# Altium PCB Trackpad.PcbDoc (part 2 of 3)
Units mm, origin at the board's own origin, x right, y up, seen from the top; angles counter-clockwise.
Board outline 170 x 125 mm, 6 copper layers (Top Layer, Inner 1, Inner 2, Inner 3, Inner 4, Bottom Layer), stack 1.58 mm thick; 124 components, 120 nets, 488 pads, 1566 vias.
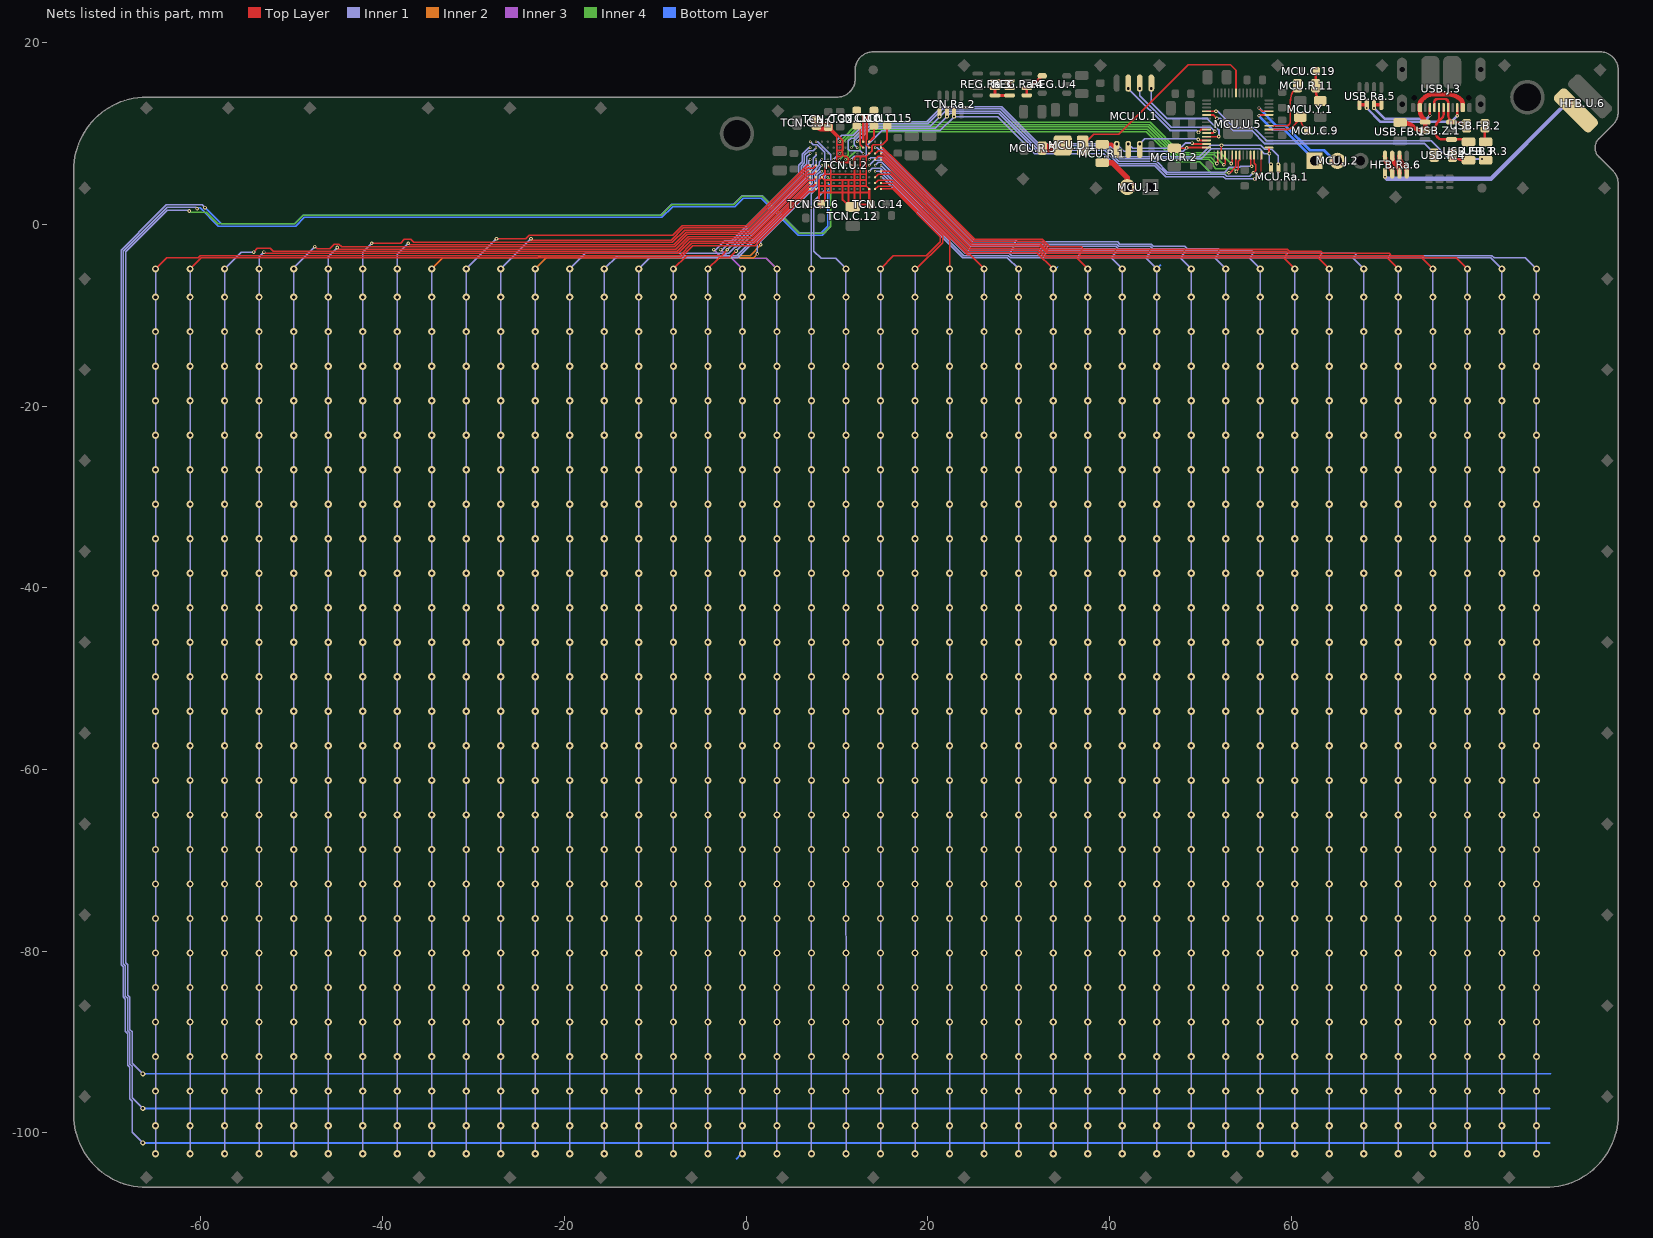
[diagram p6: the nets of this part, all layers, seen from the top]

## Via types
v1: diameter 0.8, hole 0.4, Top Layer to Bottom Layer, tented both sides, 1109 vias
v2: diameter 0.4, hole 0.2, Top Layer to Bottom Layer, tented both sides, 131 vias
v3: diameter 0.55, hole 0.3, Top Layer to Bottom Layer, tented both sides, 97 vias
v4: diameter 0.25, hole 0.15, Top Layer to Bottom Layer, tented both sides, 74 vias
v5: diameter 1.016, hole 0.508, Top Layer to Bottom Layer, tented both sides, 60 vias
v6: diameter 0.45, hole 0.3, Top Layer to Bottom Layer, tented both sides, 37 vias
v7: diameter 0.35, hole 0.2, Top Layer to Bottom Layer, tented both sides, 31 vias
v8: diameter 0.7, hole 0.4, Top Layer to Bottom Layer, tented both sides, 22 vias
v9: diameter 0.6, hole 0.3, Top Layer to Bottom Layer, tented both sides, 3 vias
v10: diameter 0.7, hole 0.3, Top Layer to Bottom Layer, tented both sides, 2 vias

## Nets (pads, with @x,y where several pads share a name; then routed paths per layer and width w, separated by ;. In a path a pad name is that pad's centre, name@x,y a point inside that pad or via, vN(x,y) a via of type N, cw(c..) or ccw(c..) an arc to the next point about the centre after c; other vN are vias at no path point) (continued)
NetHFB.Ra.6_2: HFB.Ra.6.2 HFB.Ra.6.8 | length 2.1
  Top Layer w0.5: HFB.Ra.6.2@71.925,7.525 ccw(c73.192,7.525) 72.296,6.629 72.375,6.55 cw(c71.53,5.705) 72.725,5.705 HFB.Ra.6.8@72.725,5.625
NetHFB.Ra.6_3: HFB.Ra.6.3 HFB.Ra.6.7 | length 2.1
  Top Layer w0.5: HFB.Ra.6.3@71.125,7.525 ccw(c72.513,7.525) 71.532,6.543 71.575,6.5 cw(c70.73,5.655) 71.925,5.655 HFB.Ra.6.7@71.925,5.625
NetHFB.Ra.6_4: HFB.Ra.6.4 HFB.Ra.6.6 | length 2.1
  Top Layer w0.5: HFB.Ra.6.4@70.325,7.525 ccw(c71.834,7.525) 70.767,6.458 70.789,6.436 cw(c69.978,5.625) HFB.Ra.6.6@71.125,5.625
NetHFB.Ra.6_5: HFB.Ra.6.5 HFB.U.6.1 | length 23.8
  Top Layer w0.45: v2(70.325,5.25) HFB.Ra.6.5@70.325,5.625
  Inner 1 w0.45: v2(70.325,5.25) 70.55,5.025 81.975,5.025 90,13.05 v2(90.3,13.05)
NetMCU.C.9_1: MCU.C.9.1 MCU.U.5.20 MCU.Y.1.1 | length 5.8
  Top Layer w0.2: MCU.U.5.20@57.55,10.45 59.53,10.45 ccw(c59.53,11.162) 60.034,10.659 60.876,11.501 ccw(c60.578,11.8) MCU.Y.1.1@61,11.798 ; MCU.C.9.1@61.8,10.3 61.495,10.605 cw(c62.69,11.8) MCU.Y.1.1@61,11.798 ; MCU.Y.1.1@61,11.798 cw(c62.69,11.8) MCU.Y.1.1@61,11.8 cw(c60.578,11.8) MCU.Y.1.1@61,11.798
NetMCU.C.19_2: MCU.C.19.2 MCU.R.11.2 MCU.Y.1.3 | length 3.4
  Top Layer w0.27: MCU.C.19.2@62.775,16.85 ccw(c62.95,16.675) 62.702,16.675 MCU.R.11.2@62.702,15.275 62.702,14.801 ccw(c64.401,14.801) MCU.Y.1.3@63.2,13.6
NetMCU.D.1_1: MCU.D.1.1 MCU.U.5.36 | length 23.3
  Top Layer w0.2: MCU.D.1.1@37.05,8.7 38.275,9.925 41,9.925 48.65,17.575 53.325,17.575 53.925,16.975 MCU.U.5.36@53.925,14.475
NetMCU.D.1_2: MCU.D.1.2 MCU.R.5.2 | length 2.3
  Top Layer w1: MCU.R.5.2@32.625,8.4 34.126,8.4 ccw(c34.126,9.424) MCU.D.1.2@34.85,8.7
NetMCU.J.1_2: MCU.J.1.2 MCU.R.1.1 | length 4.5
  Top Layer w0.6: MCU.R.1.1@39.2,6.798 40.277,6.798 41.96,5.115 MCU.J.1.2@41.96,4.1
NetMCU.J.2_1: MCU.J.2.1 MCU.U.5.24 | length 9.3
  Top Layer w0.2: v7(56.45,11.95) cw(c56.691,11.709) 56.691,12.05 MCU.U.5.24@57.55,12.05
  Bottom Layer w0.3: v7(56.45,11.95) 57.95,10.45 59.2,10.45 62.56,7.09 MCU.J.2.1@62.56,7
NetMCU.J.2_2: MCU.J.2.2 MCU.U.5.25 | length 12.3
  Top Layer w0.2: v7(56.45,12.8) 56.8,12.45 MCU.U.5.25@57.55,12.45
  Bottom Layer w0.3: v7(56.45,12.8) 58.4,10.85 59.4,10.85 62.088,8.163 63.638,8.163 64.8,7 MCU.J.2.2@65.1,7
NetMCU.R.1_2: MCU.R.1.2 MCU.R.2.2 MCU.U.1.1 MCU.U.5.56 | length 13.6
  Top Layer w0.2: MCU.R.2.2@47.15,8.377 48.452,8.377 v2(48.5,8.425) 48.525,8.45 MCU.U.5.56@50.7,8.45
  Top Layer w0.4: MCU.R.1.2@39.2,8.802 40.243,8.802 MCU.U.1.1@40.795,8.25
  Inner 1 w0.2: v3(40.8,8.85) 41.6,8.05 48.125,8.05 v2(48.5,8.425)
NetMCU.R.11_1: MCU.R.11.1 MCU.U.5.21 | length 6.8
  Top Layer w0.2: MCU.U.5.21@57.55,10.85 59.45,10.85 ccw(c59.45,11.3) 59.9,11.3 59.9,13.425 cw(c62.44,13.425) 60.644,15.221 MCU.R.11.1@60.698,15.275
NetMCU.Ra.1_3: MCU.Ra.1.3 MCU.U.5.3 TCN.U.2.F9 | length 57.7
  Top Layer w0.15: MCU.U.5.3@52.325,7.625 v2(52.325,8.7)
  Inner 1 w0.15: v4(9.65,7.15) 9.975,7.475 9.975,9.25 10.525,9.8 11.8,9.8 13.325,11.325 19.875,11.325 21.525,12.975 28.136,12.975 32.211,8.9 39.806,8.9 41.256,7.45 49.875,7.45 51.125,8.7 v2(52.325,8.7) 56.675,8.7 57.1,8.275 57.875,8.275 58.585,7.565 v7(58.585,6.594)
NetMCU.Ra.1_4: MCU.Ra.1.4 MCU.U.5.15 TCN.U.2.G4 | length 55.5
  Top Layer w0.2: MCU.U.5.15@57.55,8.45 57.55,7.85 v2(57.6,7.8)
  Inner 1 w0.15: v4(12.9,7.8) 12.575,8.125 11.4,8.125 11.275,8.25 11.275,9.2 11.575,9.5 11.854,9.5 13.429,11.075 20,11.075 21.65,12.725 28.032,12.725 32.107,8.65 39.702,8.65 41.152,7.2 50.1,7.2 51.2,8.3 56.55,8.3 57.05,7.8 v2(57.6,7.8) 57.6,6.779 v7(57.785,6.594)
NetMCU.U.1_2: MCU.U.1.2 MCU.U.5.55 | length 9.1
  Top Layer w0.2: v2(49.1,8.95) 49.2,8.85 MCU.U.5.55@50.7,8.85
  Inner 1 w0.2: v3(42.075,8.85) 42.55,8.375 47.775,8.375 48.35,8.95 v2(49.1,8.95)
NetMCU.U.1_3: MCU.U.1.3 MCU.U.5.54 | length 7.7
  Top Layer w0.2: v2(49.775,9.35) 49.875,9.25 MCU.U.5.54@50.7,9.25
  Inner 1 w0.2: v3(43.325,8.85) 43.9,9.425 49.7,9.425 v2(49.775,9.35)
NetMCU.U.1_5: MCU.U.1.5 MCU.U.5.53 | length 12.3
  Top Layer w0.2: MCU.U.5.53@50.7,9.65 52,9.65 v2(52.025,9.675)
  Inner 1 w0.2: v3(44.6,14.95) 44.6,13.4 46.35,11.65 50.775,11.65 52.05,10.375 52.05,9.7 v2(52.025,9.675)
NetMCU.U.1_6: MCU.U.1.6 MCU.U.5.52 | length 11.7
  Top Layer w0.2: MCU.U.5.52@50.7,10.05 51.4,10.05 v2(51.6,10.25)
  Inner 1 w0.2: v3(43.325,14.95) 43.325,14.175 46.8,10.7 51.15,10.7 v2(51.6,10.25)
NetMCU.U.1_7: MCU.U.1.7 MCU.U.5.51 | length 10.8
  Top Layer w0.2: v2(49.8,10.125) 50.125,10.45 MCU.U.5.51@50.7,10.45
  Inner 1 w0.2: v3(42.075,14.95) 46.675,10.35 49.575,10.35 v2(49.8,10.125)
NetMCU.U.5_2: MCU.U.5.2 TCN.U.2.F8 | length 46.6
  Top Layer w0.15: v2(51.825,6.7) 51.925,6.8 MCU.U.5.2@51.925,7.625
  Inner 4 w0.15: v4(10.3,7.15) 10.625,7.475 11.1,7.475 11.275,7.65 11.275,9.325 12.675,10.725 44.279,10.725 47.604,7.4 51.125,7.4 v2(51.825,6.7)
NetMCU.U.5_4: MCU.U.5.4 TCN.U.2.G8 | length 47.1
  Top Layer w0.15: v2(52.6,6.575) 52.725,6.7 MCU.U.5.4@52.725,7.625
  Inner 4 w0.15: v4(10.3,7.8) 10.625,8.125 10.625,9.05 12.55,10.975 44.382,10.975 47.707,7.65 51.525,7.65 v2(52.6,6.575)
NetMCU.U.5_6: MCU.U.5.6 TCN.U.2.J8 | length 46.8
  Top Layer w0.15: v2(53.4,6.7) 53.525,6.825 MCU.U.5.6@53.525,7.625
  Inner 4 w0.15: v4(10.3,9.1) 12.425,11.225 44.486,11.225 47.805,7.905 52.195,7.905 v2(53.4,6.7)
NetMCU.U.5_7: MCU.U.5.7 TCN.U.2.F7 | length 48.7
  Top Layer w0.15: v2(53.15,5.675) 53.275,5.675 53.925,6.325 MCU.U.5.7@53.925,7.625
  Inner 4 w0.15: v4(10.95,7.15) 11.15,7.15 12.125,8.125 12.425,8.125 12.575,8.275 12.575,9.875 12.925,10.225 44.071,10.225 47.396,6.9 49.95,6.9 51.15,5.7 53.175,5.7 v2(53.15,5.675)
NetMCU.U.5_8: MCU.U.5.8 TCN.U.2.H6 | length 47.7
  Top Layer w0.15: v2(53.975,5.825) 54.2,6.05 54.2,6.95 54.32,7.07 54.32,7.62 MCU.U.5.8@54.325,7.625
  Inner 4 w0.15: v4(11.6,8.45) 11.925,8.775 11.925,9.6 12.8,10.475 44.175,10.475 47.5,7.15 50.925,7.15 51.4,6.675 51.4,6.475 51.725,6.15 53.65,6.15 v2(53.975,5.825)
NetMCU.U.5_11: MCU.U.5.11 TCN.Ra.2.1 TCN.U.2.H5 | length 50.3
  Top Layer w0.15: MCU.U.5.11@55.525,7.625 55.525,6.525 v2(55.65,6.4)
  Inner 1 w0.15: v4(12.25,8.45) 11.925,8.775 11.925,9.2 13.55,10.825 20.25,10.825 v7(21.3,11.875) 21.9,12.475 27.929,12.475 32.004,8.4 39.599,8.4 41.049,6.95 45.182,6.95 46.382,5.75 52.675,5.75 53.2,6.275 54.35,6.275 54.475,6.4 v2(55.65,6.4)
NetMCU.U.5_12: MCU.U.5.12 TCN.Ra.2.2 TCN.U.2.J5 | length 50
  Top Layer w0.15: v2(55.825,5.675) 56.075,5.925 56.075,6.575 55.925,6.725 MCU.U.5.12@55.925,7.625
  Inner 1 w0.15: v4(12.25,9.1) 13.725,10.575 20.8,10.575 v7(22.1,11.875) 22.45,12.225 27.825,12.225 31.9,8.15 39.495,8.15 40.945,6.7 45.079,6.7 46.279,5.5 52.675,5.5 52.9,5.275 55.425,5.275 v2(55.825,5.675)
NetMCU.U.5_14: MCU.U.5.14 TCN.Ra.2.3 TCN.U.2.F6 | length 52.7
  Top Layer w0.12: v2(56,5) 56.725,5.725 MCU.U.5.14@56.725,7.625
  Inner 1 w0.15: v4(11.6,7.15) 11.925,7.475 13.075,7.475 13.225,7.625 13.225,8.575 14.95,10.3 21.325,10.3 v7(22.9,11.875) 27.68,11.875 31.755,7.8 39.35,7.8 40.7,6.45 44.975,6.45 46.175,5.25 52.55,5.25 52.8,5 v2(56,5)
NetMCU.U.5_46: MCU.U.5.46 USB.R.3.2 | length 32.9
  Top Layer w0.2: MCU.U.5.46@50.7,12.45 v2(51.725,12.45) ; v2(81,7.2) ccw(c81.308,7.508) 81.308,7.073 USB.R.3.2@81.4,7.073
  Inner 1 w0.2: v2(51.725,12.45) 51.925,12.45 53.75,10.625 55.875,10.625 57.3,9.2 75.4,9.2 77.4,7.2 v2(81,7.2)
NetMCU.U.5_47: MCU.U.5.47 USB.R.4.2 | length 27
  Top Layer w0.2: MCU.U.5.47@50.7,12.05 51.425,12.05 v2(51.825,11.65) ; v2(75.6,8) 75.6,7.956 ccw(c76.104,7.956) USB.R.4.2@75.748,7.6
  Inner 1 w0.2: v2(51.825,11.65) 52.25,11.65 53.6,10.3 55.7,10.3 57.1,8.9 74.7,8.9 v2(75.6,8)
NetREG.Ra.3_5: REG.Ra.3.5 REG.Ra.3.6 REG.Ra.4.4 | length 2.4
  Top Layer w0.3: REG.Ra.3.6@27.4,15 REG.Ra.3.5@27.4,14.2 REG.Ra.4.4@29,14.2
NetREG.Ra.3_7: REG.Ra.3.7 REG.Ra.4.2 REG.Ra.4.3 | length 2.4
  Top Layer w0.3: REG.Ra.3.7@27.4,15.8 REG.Ra.4.2@29,15.8 REG.Ra.4.3@29,15
NetREG.Ra.4_5: REG.Ra.4.5 REG.Ra.4.6 REG.U.4.4 | length 3.1
  Top Layer w0.3: REG.Ra.4.5@30.9,14.2 REG.Ra.4.6@30.9,15 31.2,15 32.55,16.35 REG.U.4.4@32.6,16.35
NetTCN.C.10_1: TCN.C.10.1 TCN.U.2.J4 | length 3.8
  Top Layer w0.25: TCN.C.10.1@12.175,12.55 12.9,11.825 12.9,10.125 TCN.U.2.J4@12.9,9.1
NetTCN.C.10_2: TCN.C.10.2 TCN.U.2.H4 | length 2.7
  Top Layer w0.2: TCN.C.10.2@12.175,10.85 12.575,10.45 12.575,8.775 TCN.U.2.H4@12.9,8.45
NetTCN.C.11_1: TCN.C.11.1 TCN.U.2.H3 | length 4.6
  Top Layer w0.2: 13.288,9.388 13.225,9.325 13.225,8.775 TCN.U.2.H3@13.55,8.45
  Top Layer w0.25: 13.288,9.388 13.288,11.763 TCN.C.11.1@14.075,12.55
NetTCN.C.11_2: TCN.C.11.2 TCN.U.2.J3 | length 2
  Top Layer w0.25: TCN.U.2.J3@13.55,9.1 14.075,9.625 TCN.C.11.2@14.075,10.85
NetTCN.C.12_2: TCN.C.12.2 TCN.C.14.2 TCN.C.15.2 TCN.C.16.2 TCN.U.2.A3 TCN.U.2.C11 TCN.U.2.E10 TCN.U.2.G3 | length 63
  Top Layer w0.2: 13.55,3.5 12.575,3.5 ; TCN.U.2.A3@13.55,3.9 13.225,4.225 ; TCN.C.15.2@15.525,10.85 15.5,10.825 15.5,9.275 15,8.775 14,8.775 13.875,8.65 13.875,8.125 TCN.U.2.G3@13.55,7.8 13.225,7.475 ; 8.025,3.5 8.675,3.5 ; 8.025,3.5 8.025,4.225 ; 8.025,3.5 8.025,2.45 TCN.C.16.2@8.275,2.2 8.675,2.6 8.675,3.5 ; 8.025,4.225 8.675,4.225 ; 8.025,4.225 8.025,4.875 TCN.U.2.C11@8.35,5.2 ; TCN.U.2.C11@8.35,5.2 8.675,4.875 ; TCN.U.2.C11@8.35,5.2 8.675,5.525 ; 8.675,3.5 9.325,3.5 ; 8.675,3.5 8.675,4.225 ; 8.675,4.225 9.325,4.225 ; 8.675,4.225 8.675,4.875 ; 8.675,4.875 9.325,4.875 ; 8.675,5.525 9.325,5.525 ; 8.675,5.525 8.675,6.175 TCN.U.2.E10@9,6.5 9.325,6.175 9.325,5.525 ; 9.325,3.5 10.625,3.5 ; 9.325,3.5 9.325,4.225 ; 9.325,4.225 10.625,4.225 ; 9.325,4.225 9.325,4.875 ; 9.325,4.875 9.325,5.525 ; 9.325,4.875 10.625,4.875 ; 9.325,5.525 11.925,5.525 ; 10.625,3.5 10.625,2.7 11.398,1.927 TCN.C.12.2@11.75,1.927 ; 10.625,3.5 11.275,3.5 ; 10.625,3.5 10.625,4.225 ; 10.625,4.225 11.275,4.225 ; 10.625,4.225 10.625,4.875 ; 10.625,4.875 11.275,4.875 ; 11.275,3.5 11.925,3.5 ; 11.275,3.5 11.275,4.225 ; 11.275,3.5 11.275,2.402 TCN.C.12.2@11.75,1.927 ; 11.275,4.225 11.925,4.225 ; 11.275,4.225 11.275,4.875 ; 11.275,4.875 11.925,4.875 ; TCN.C.12.2@11.75,1.927 12.002,1.927 12.275,2.2 12.575,2.5 12.575,3.5 ; TCN.C.12.2@11.75,1.927 11.925,2.102 11.925,3.5 ; 11.925,3.5 12.575,3.5 ; 11.925,3.5 11.925,4.225 ; 11.925,4.225 11.925,4.875 ; 11.925,4.225 12.575,4.225 ; 11.925,4.875 11.925,5.525 ; 11.925,4.875 12.575,4.875 ; 11.925,5.525 12.575,5.525 ; 11.925,5.525 11.925,7.3 12.1,7.475 12.75,7.475 ; 12.575,3.5 12.575,4.225 ; 12.575,4.225 13.225,4.225 ; 12.575,4.225 12.575,4.875 ; 12.575,4.875 12.575,5.525 ; 12.575,4.875 13.225,4.875 ; 12.575,5.525 12.575,7.3 12.75,7.475 ; 12.575,5.525 13.225,5.525 ; 12.75,7.475 13.225,7.475 ; 13.225,4.225 13.225,4.875 ; 13.225,4.875 13.225,5.525 ; 13.225,5.525 13.225,7.475
  Top Layer w0.25: TCN.C.12.2@11.925,2.102 12.023,2.2 12.275,2.2 TCN.C.14.2@13.725,2.2 13.55,2.375 13.55,3.5 TCN.U.2.A3@13.55,3.9
NetTCN.C.31_2: TCN.C.31.2 TCN.C.32.2 TCN.U.2.E6 | length 14.5
  Top Layer w0.2: TCN.U.2.E6@11.6,6.5 11.275,6.825 ; 9.975,7.475 9.975,8.15 ; 9.975,7.475 9.975,7 10.15,6.825 11.275,6.825 ; 9.975,7.475 10.45,7.475 10.625,7.65 ; 9.975,8.15 9.975,8.775 ; 9.975,8.15 10,8.125 10.625,8.125 ; 9.975,8.775 9.975,9.65 9.05,10.575 TCN.C.32.2@9.05,10.7 9.2,10.7 10.625,9.275 10.625,8.775 ; 9.975,8.775 10.625,8.775 ; 10.625,7.65 10.625,8.125 ; 10.625,7.65 10.8,7.475 11.075,7.475 11.275,7.275 11.275,6.825 ; 10.625,8.125 10.625,8.775
  Top Layer w1: TCN.C.31.2@7.727,11.2 8.227,10.7 TCN.C.32.2@9.05,10.7
NetUSB.FB.1_1: USB.FB.1.1 USB.J.3.2 USB.J.3.11 USB.Z.1.4 USB.Z.1.5 | length 12
  Top Layer w0.5: USB.FB.1.1@72.293,11.2 cw(c72.293,9.493) 73.5,10.7 ccw(c74.466,11.666) USB.Z.1.5@74.466,10.3 ; USB.Z.1.5@74.366,10.3 USB.Z.1.5@74.466,10.3 ; USB.J.3.2@78.875,12.85 78.875,13.278 ccw(c78.278,13.278) 78.7,13.7 ccw(c77.131,12.131) 77.131,14.35 75.675,14.35 ccw(c75.675,12.841) 74.608,13.908 74.325,13.625 ccw(c74.687,13.263) 74.175,13.263 USB.J.3.11@74.175,12.85 74.175,12.51 ccw(c75.285,12.51) 74.5,11.725 cw(c73.896,11.121) 74.75,11.121 USB.Z.1.5@74.75,10.3 USB.Z.1.5@74.466,10.3
NetUSB.FB.2_1: USB.FB.2.1 USB.J.3.5 USB.J.3.8 USB.Z.1.3 | length 6.6
  Top Layer w0.27: USB.J.3.8@75.775,12.85 75.775,13.5 cw(c76.075,13.5) 76.075,13.8 76.95,13.8 cw(c76.95,13.475) 77.275,13.475 USB.J.3.5@77.275,12.85 77.275,12.155 ccw(c78.555,12.155) USB.Z.1.3@77.65,11.25 78.357,11.25 cw(c78.357,9.884) USB.FB.2.1@79.323,10.85
NetUSB.FB.2_2: USB.FB.2.2 USB.R.3.1 | length 1.8
  Top Layer w0.27: USB.FB.2.2@81.327,10.85 81.327,9.253 ccw(c81.575,9.253) USB.R.3.1@81.4,9.077
NetUSB.FB.3_1: USB.FB.3.1 USB.J.3.6 USB.J.3.7 USB.Z.1.1 | length 8.9
  Top Layer w0.27: USB.J.3.7@76.275,12.85 76.275,11.587 cw(c75.763,11.587) 76.125,11.225 ; USB.J.3.6@76.775,12.85 76.775,12.1 cw(c76.232,12.1) 76.616,11.716 76.125,11.225 ; USB.FB.3.1@79.525,9.077 ccw(c78.867,8.419) 78.867,9.35 USB.Z.1.1@77.65,9.35 76.704,9.35 cw(c76.704,10.204) 76.1,9.6 cw(c76.704,10.204) 75.85,10.204 75.85,10.561 cw(c76.789,10.561) 76.125,11.225
NetUSB.FB.3_2: USB.FB.3.2 USB.R.4.1 | length 1.9
  Top Layer w0.27: USB.R.4.1@77.752,7.6 ccw(c79.026,8.873) 79.026,7.073 USB.FB.3.2@79.525,7.073
NetUSB.J.3_3: USB.J.3.3 USB.Ra.5.5 USB.Ra.5.6 | length 12.6
  Top Layer w0.27: v7(78.275,11.95) USB.J.3.3@78.275,12.85
  Top Layer w0.4: USB.Ra.5.5@67.525,13.175 USB.Ra.5.6@68.325,13.175
  Inner 1 w0.27: v7(68.325,12.8) 69.85,11.275 77.6,11.275 v7(78.275,11.95)
NetUSB.J.3_9: USB.J.3.9 USB.Ra.5.7 USB.Ra.5.8 | length 8.4
  Top Layer w0.27: v7(75.275,11.975) USB.J.3.9@75.275,12.85
  Top Layer w0.4: USB.Ra.5.7@69.125,13.175 USB.Ra.5.8@69.925,13.175
  Inner 1 w0.27: v7(69.125,12.8) 70.275,11.65 74.95,11.65 v7(75.275,11.975)
X0: TCN.U.2.A13 | length 173.2
  Top Layer w0.15: v1(-65,-4.9) -63.775,-3.675 -60.314,-3.675 -60.074,-3.435 -7.31,-3.435 -5.975,-2.1 0.904,-2.1 6.904,3.9 TCN.U.2.A13@7.05,3.9
  Inner 1 w0.15: v1@-65,-102.4 v1(-65,-102.3) v1(-65,-99.2) v1(-65,-95.4) v1(-65,-91.6) v1(-65,-87.8) v1(-65,-84) v1(-65,-80.2) v1(-65,-76.4) v1(-65,-72.6) v1(-65,-68.8) v1(-65,-65) v1(-65,-61.2) v1(-65,-57.4) v1(-65,-53.6) v1(-65,-49.8) v1(-65,-46) v1(-65,-42.2) v1(-65,-38.4) v1(-65,-34.6) v1(-65,-30.8) v1(-65,-27) v1(-65,-23.2) v1(-65,-19.4) v1(-65,-15.6) v1(-65,-11.8) v1(-65,-8) v1(-65,-4.9) ; v1(-65,-4.9) cw(c-53.653,-16.247) -64.995,-4.895 v1(-65,-4.9)
X1: TCN.U.2.A12 | length 170
  Top Layer w0.15: v1(-61.2,-4.9) -59.975,-3.675 -7.2,-3.675 -5.875,-2.35 0.993,-2.35 6.918,3.575 7.375,3.575 TCN.U.2.A12@7.7,3.9
  Inner 1 w0.15: v1@-61.2,-102.4 v1(-61.2,-102.3) v1(-61.2,-99.2) v1(-61.2,-95.4) v1(-61.2,-91.6) v1(-61.2,-87.8) v1(-61.2,-84) v1(-61.2,-80.2) v1(-61.2,-76.4) v1(-61.2,-30.8) v1(-61.2,-27) v1(-61.2,-4.9)
  other v1: -61.2,-72.6 -61.2,-68.8 -61.2,-65 -61.2,-61.2 -61.2,-57.4 -61.2,-53.6 -61.2,-49.8 -61.2,-46 -61.2,-42.2 -61.2,-38.4 -61.2,-34.6 -61.2,-23.2 -61.2,-19.4 -61.2,-15.6 -61.2,-11.8 -61.2,-8
X2: TCN.U.2.B13 | length 166.5
  Top Layer w0.15: v2(-54.2,-3.05) -53.8,-2.65 -52.35,-2.65 -52.05,-2.95 -7.6,-2.95 -6.25,-1.6 0.725,-1.6 6.875,4.55 TCN.U.2.B13@7.05,4.55
  Inner 1 w0.15: v1@-57.4,-102.4 v1(-57.4,-102.3) v1(-57.4,-99.2) v1(-57.4,-95.4) v1(-57.4,-91.6) v1(-57.4,-87.8) v1(-57.4,-84) v1(-57.4,-80.2) v1(-57.4,-76.4) v1(-57.4,-30.8) v1(-57.4,-27) v1(-57.4,-4.9) -55.55,-3.05 v2(-54.2,-3.05)
  Bottom Layer w0.15: v1(-57.4,-4.9) v1@-57.137,-4.637
  other v1: -57.4,-72.6 -57.4,-68.8 -57.4,-65 -57.4,-61.2 -57.4,-57.4 -57.4,-53.6 -57.4,-49.8 -57.4,-46 -57.4,-42.2 -57.4,-38.4 -57.4,-34.6 -57.4,-23.2 -57.4,-19.4 -57.4,-15.6 -57.4,-11.8 -57.4,-8
X3: TCN.U.2.B12 | length 163.8
  Top Layer w0.15: v2(-53.075,-3.05) -52.93,-3.195 -7.47,-3.195 -6.125,-1.85 0.814,-1.85 6.889,4.225 7.375,4.225 TCN.U.2.B12@7.7,4.55
  Inner 1 w0.15: v1@-53.6,-102.4 v1(-53.6,-102.3) v1(-53.6,-99.2) v1(-53.6,-95.4) v1(-53.6,-91.6) v1(-53.6,-87.8) v1(-53.6,-84) v1(-53.6,-80.2) v1(-53.6,-76.4) v1(-53.6,-72.6) v1(-53.6,-68.8) v1(-53.6,-65) v1(-53.6,-61.2) v1(-53.6,-57.4) v1(-53.6,-53.6) v1(-53.6,-49.8) v1(-53.6,-46) v1(-53.6,-42.2) v1(-53.6,-38.4) v1(-53.6,-34.6) v1(-53.6,-30.8) v1(-53.6,-27) v1(-53.6,-23.2) v1(-53.6,-19.4) v1(-53.6,-15.6) v1(-53.6,-11.8) v1(-53.6,-8) v1(-53.6,-4.9) -53.6,-3.575 v2(-53.075,-3.05)
  Bottom Layer w0.15: v1(-53.6,-4.9) v1@-53.479,-4.779
X4: TCN.U.2.C13 | length 159.1
  Top Layer w0.15: v2(-47.475,-2.45) -47.225,-2.7 -45.85,-2.7 -45.325,-2.175 -44.825,-2.175 -44.53,-2.47 -7.87,-2.47 -6.5,-1.1 0.546,-1.1 6.676,5.03 6.846,5.2 TCN.U.2.C13@7.05,5.2
  Inner 1 w0.15: v1@-49.8,-102.4 v1(-49.8,-102.3) v1(-49.8,-99.2) v1(-49.8,-95.4) v1(-49.8,-91.6) v1(-49.8,-87.8) v1(-49.8,-84) v1(-49.8,-80.2) v1(-49.8,-76.4) v1(-49.8,-30.8) v1(-49.8,-27) v1(-49.8,-4.9) -49.8,-4.775 v2(-47.475,-2.45)
  other v1: -49.8,-72.6 -49.8,-68.8 -49.8,-65 -49.8,-61.2 -49.8,-57.4 -49.8,-53.6 -49.8,-49.8 -49.8,-46 -49.8,-42.2 -49.8,-38.4 -49.8,-34.6 -49.8,-23.2 -49.8,-19.4 -49.8,-15.6 -49.8,-11.8 -49.8,-8
X5: TCN.U.2.C12 | length 156.3
  Top Layer w0.15: v2(-45,-2.55) -44.84,-2.71 -7.735,-2.71 -6.375,-1.35 0.636,-1.35 6.861,4.875 7.375,4.875 TCN.U.2.C12@7.7,5.2
  Inner 1 w0.15: v1@-46,-102.4 v1(-46,-102.3) v1(-46,-99.2) v1(-46,-95.4) v1(-46,-91.6) v1(-46,-87.8) v1(-46,-84) v1(-46,-80.2) v1(-46,-76.4) v1(-46,-30.8) v1(-46,-27) v1(-46,-4.9) -46,-3.55 v2(-45,-2.55)
  other v1: -46,-72.6 -46,-68.8 -46,-65 -46,-61.2 -46,-57.4 -46,-53.6 -46,-49.8 -46,-46 -46,-42.2 -46,-38.4 -46,-34.6 -46,-23.2 -46,-19.4 -46,-15.6 -46,-11.8 -46,-8
X6: TCN.U.2.D13 | length 152.5
  Top Layer w0.15: v2(-41.2,-2.075) -38.025,-2.075 -37.6,-1.65 -36.9,-1.65 -36.575,-1.975 -8.125,-1.975 -6.77,-0.62 0.305,-0.62 6.775,5.85 TCN.U.2.D13@7.05,5.85
  Inner 1 w0.15: v1@-42.2,-102.4 v1(-42.2,-102.3) v1(-42.2,-99.2) v1(-42.2,-95.4) v1(-42.2,-91.6) v1(-42.2,-87.8) v1(-42.2,-84) v1(-42.2,-80.2) v1(-42.2,-76.4) v1(-42.2,-72.6) v1(-42.2,-68.8) v1(-42.2,-65) v1(-42.2,-61.2) v1(-42.2,-57.4) v1(-42.2,-53.6) v1(-42.2,-49.8) v1(-42.2,-46) v1(-42.2,-42.2) v1(-42.2,-38.4) v1(-42.2,-34.6) v1(-42.2,-30.8) v1(-42.2,-27) v1(-42.2,-23.2) v1(-42.2,-19.4) v1(-42.2,-15.6) v1(-42.2,-11.8) v1(-42.2,-8) v1(-42.2,-4.9) -42.2,-3.075 v2(-41.2,-2.075)
X7: TCN.U.2.D12 | length 149.1
  Top Layer w0.15: v2(-37.175,-2.075) -37.025,-2.225 -7.975,-2.225 -6.61,-0.86 0.415,-0.86 6.8,5.525 7.375,5.525 TCN.U.2.D12@7.7,5.85
  Inner 1 w0.15: v1@-38.4,-102.4 v1(-38.4,-102.3) v1(-38.4,-99.2) v1(-38.4,-95.4) v1(-38.4,-91.6) v1(-38.4,-87.8) v1(-38.4,-84) v1(-38.4,-80.2) v1(-38.4,-76.4) v1(-38.4,-30.8) v1(-38.4,-27) v1(-38.4,-4.9) -38.4,-3.3 v2(-37.175,-2.075)
  other v1: -38.4,-72.6 -38.4,-68.8 -38.4,-65 -38.4,-61.2 -38.4,-57.4 -38.4,-53.6 -38.4,-49.8 -38.4,-46 -38.4,-42.2 -38.4,-38.4 -38.4,-34.6 -38.4,-23.2 -38.4,-19.4 -38.4,-15.6 -38.4,-11.8 -38.4,-8
X8: TCN.U.2.D11 | length 146.1
  Inner 2 w0.15: v1(-34.6,-4.9) -33.375,-3.675 -22.925,-3.675 -22.675,-3.425 0.45,-3.425 v2(1.625,-2.25)
  Inner 1 w0.15: v1@-34.6,-102.4 v1(-34.6,-102.3) v1(-34.6,-99.2) v1(-34.6,-95.4) v1(-34.6,-91.6) v1(-34.6,-87.8) v1(-34.6,-84) v1(-34.6,-80.2) v1(-34.6,-76.4) v1(-34.6,-30.8) v1(-34.6,-27) v1(-34.6,-4.9) v1@-34.38,-4.68 ; v2(1.625,-2.25) 1.625,-1.85 7.8,4.325 7.8,5.45 8.2,5.85 v4(8.35,5.85)
  other v1: -34.6,-72.6 -34.6,-68.8 -34.6,-65 -34.6,-61.2 -34.6,-57.4 -34.6,-53.6 -34.6,-49.8 -34.6,-46 -34.6,-42.2 -34.6,-38.4 -34.6,-34.6 -34.6,-23.2 -34.6,-19.4 -34.6,-15.6 -34.6,-11.8 -34.6,-8
X9: TCN.U.2.E13 | length 140.4
  Top Layer w0.15: v2(-27.475,-1.575) -24.225,-1.575 -23.85,-1.2 -8.075,-1.2 -7.01,-0.135 0.09,-0.135 6.725,6.5 TCN.U.2.E13@7.05,6.5
  Inner 1 w0.15: v1@-30.8,-102.4 v1(-30.8,-102.3) v1(-30.8,-99.2) v1(-30.8,-95.4) v1(-30.8,-91.6) v1(-30.8,-87.8) v1(-30.8,-84) v1(-30.8,-80.2) v1(-30.8,-76.4) v1(-30.8,-30.8) v1(-30.8,-27) v1(-30.8,-4.9) ; v1@-30.563,-4.663 v1(-30.8,-4.9) ; v2(-27.475,-1.575) -30.75,-4.85 -30.75,-4.9 v1(-30.8,-4.9)
  other v1: -30.8,-72.6 -30.8,-68.8 -30.8,-65 -30.8,-61.2 -30.8,-57.4 -30.8,-53.6 -30.8,-49.8 -30.8,-46 -30.8,-42.2 -30.8,-38.4 -30.8,-34.6 -30.8,-23.2 -30.8,-19.4 -30.8,-15.6 -30.8,-11.8 -30.8,-8
X10: TCN.U.2.E12 | length 137.5
  Top Layer w0.15: v2(-23.675,-1.575) -23.525,-1.725 -8.25,-1.725 -6.9,-0.375 0.2,-0.375 6.75,6.175 7.375,6.175 TCN.U.2.E12@7.7,6.5
  Inner 1 w0.15: v1@-27,-102.4 v1(-27,-102.3) v1(-27,-99.2) v1(-27,-95.4) v1(-27,-91.6) v1(-27,-87.8) v1(-27,-84) v1(-27,-80.2) v1(-27,-76.4) v1(-27,-30.8) v1(-27,-27) v1(-27,-4.9) v2(-23.675,-1.575)
  Bottom Layer w0.15: v1(-27,-4.9) -26.714,-4.614
  other v1: -27,-72.6 -27,-68.8 -27,-65 -27,-61.2 -27,-57.4 -27,-53.6 -27,-49.8 -27,-46 -27,-42.2 -27,-38.4 -27,-34.6 -27,-23.2 -27,-19.4 -27,-15.6 -27,-11.8 -27,-8
X11: TCN.U.2.E11 | length 135.3
  Inner 2 w0.15: v1(-23.2,-4.9) -21.975,-3.675 0.825,-3.675 v2(1.25,-3.25)
  Inner 1 w0.15: v1@-23.2,-102.4 v1(-23.2,-102.3) v1(-23.2,-99.2) v1(-23.2,-95.4) v1(-23.2,-91.6) v1(-23.2,-87.8) v1(-23.2,-84) v1(-23.2,-80.2) v1(-23.2,-76.4) v1(-23.2,-30.8) v1(-23.2,-27) v1(-23.2,-4.9) ; v2(1.25,-3.25) 1.25,-1.871 7.55,4.429 7.55,5.575 8.05,6.075 8.05,6.2 v4(8.35,6.5)
  other v1: -23.2,-72.6 -23.2,-68.8 -23.2,-65 -23.2,-61.2 -23.2,-57.4 -23.2,-53.6 -23.2,-49.8 -23.2,-46 -23.2,-42.2 -23.2,-38.4 -23.2,-34.6 -23.2,-23.2 -23.2,-19.4 -23.2,-15.6 -23.2,-11.8 -23.2,-8
X12: TCN.U.2.F13 | length 129.8
  Inner 1 w0.15: v1@-19.4,-102.4 v1(-19.4,-102.3) v1(-19.4,-99.2) v1(-19.4,-95.4) v1(-19.4,-91.6) v1(-19.4,-87.8) v1(-19.4,-84) v1(-19.4,-80.2) v1(-19.4,-76.4) v1(-19.4,-30.8) v1(-19.4,-27) v1(-19.4,-4.9) -17.675,-3.175 -1.9,-3.175 -1.25,-2.525 -1.125,-2.525 6.55,5.15 6.55,6.1 6.925,6.475 6.925,6.6 6.925,7.025 v4(7.05,7.15)
  other v1: -19.4,-72.6 -19.4,-68.8 -19.4,-65 -19.4,-61.2 -19.4,-57.4 -19.4,-53.6 -19.4,-49.8 -19.4,-46 -19.4,-42.2 -19.4,-38.4 -19.4,-34.6 -19.4,-23.2 -19.4,-19.4 -19.4,-15.6 -19.4,-11.8 -19.4,-8
X13: TCN.U.2.F12 | length 126.9
  Inner 1 w0.15: v1@-15.6,-102.4 v1(-15.6,-102.3) v1(-15.6,-99.2) v1(-15.6,-95.4) v1(-15.6,-91.6) v1(-15.6,-87.8) v1(-15.6,-84) v1(-15.6,-80.2) v1(-15.6,-76.4) v1(-15.6,-30.8) v1(-15.6,-27) v1(-15.6,-4.9) -14.125,-3.425 -1.05,-3.425 7.05,4.675 7.05,5.85 7.475,6.275 7.475,6.4 7.7,6.625 v4(7.7,7.15)
  other v1: -15.6,-72.6 -15.6,-68.8 -15.6,-65 -15.6,-61.2 -15.6,-57.4 -15.6,-53.6 -15.6,-49.8 -15.6,-46 -15.6,-42.2 -15.6,-38.4 -15.6,-34.6 -15.6,-23.2 -15.6,-19.4 -15.6,-15.6 -15.6,-11.8 -15.6,-8
X14: TCN.U.2.F11 | length 123.5
  Inner 1 w0.15: v1@-11.8,-102.4 v1(-11.8,-102.3) v1(-11.8,-99.2) v1(-11.8,-95.4) v1(-11.8,-91.6) v1(-11.8,-87.8) v1(-11.8,-84) v1(-11.8,-80.2) v1(-11.8,-76.4) v1(-11.8,-30.8) v1(-11.8,-27) v1(-11.8,-4.9) -10.575,-3.675 -0.925,-3.675 6.825,4.075 6.825,4.079 7.3,4.554 7.3,5.7 7.775,6.175 7.775,6.3 8.05,6.575 8.05,6.85 v4(8.35,7.15)
  other v1: -11.8,-72.6 -11.8,-68.8 -11.8,-65 -11.8,-61.2 -11.8,-57.4 -11.8,-53.6 -11.8,-49.8 -11.8,-46 -11.8,-42.2 -11.8,-38.4 -11.8,-34.6 -11.8,-23.2 -11.8,-19.4 -11.8,-15.6 -11.8,-11.8 -11.8,-8
X15: TCN.U.2.G13 | length 118.8
  Top Layer w0.15: v1(-8,-4.9) -6.525,-3.425 -2.7,-3.425 v2(-2.075,-2.8)
  Inner 1 w0.15: v1@-8,-102.4 v1(-8,-102.3) v1(-8,-99.2) v1(-8,-95.4) v1(-8,-91.6) v1(-8,-87.8) v1(-8,-84) v1(-8,-80.2) v1(-8,-76.4) v1(-8,-30.8) v1(-8,-27) v1(-8,-4.9) ; v2(-2.075,-2.8) -1.55,-2.275 -1.325,-2.275 6.3,5.35 6.3,6.275 6.675,6.65 6.675,7.425 v4(7.05,7.8)
  other v1: -8,-72.6 -8,-68.8 -8,-65 -8,-61.2 -8,-57.4 -8,-53.6 -8,-49.8 -8,-46 -8,-42.2 -8,-38.4 -8,-34.6 -8,-23.2 -8,-19.4 -8,-15.6 -8,-11.8 -8,-8
X16: TCN.U.2.G12 | length 115.8
  Top Layer w0.15: v1(-4.2,-4.9) -2.975,-3.675 -1.85,-3.675 v2(-1.1,-2.925)
  Inner 1 w0.15: v1@-4.2,-102.4 v1(-4.2,-102.3) v1(-4.2,-99.2) v1(-4.2,-95.4) v1(-4.2,-91.6) v1(-4.2,-87.8) v1(-4.2,-84) v1(-4.2,-80.2) v1(-4.2,-76.4) v1(-4.2,-30.8) v1(-4.2,-27) v1(-4.2,-4.9) ; v2(-1.1,-2.925) 6.8,4.975 6.8,5.975 7.2,6.375 7.2,6.5 7.375,6.675 7.375,7.275 7.7,7.6 v4(7.7,7.8)
  other v1: -4.2,-72.6 -4.2,-68.8 -4.2,-65 -4.2,-61.2 -4.2,-57.4 -4.2,-53.6 -4.2,-49.8 -4.2,-46 -4.2,-42.2 -4.2,-38.4 -4.2,-34.6 -4.2,-23.2 -4.2,-19.4 -4.2,-15.6 -4.2,-11.8 -4.2,-8
X17: TCN.U.2.H13 | length 118.6
  Inner 3 w0.15: v2(-3.55,-2.775) -2.65,-3.675 -1.625,-3.675 v1(-0.4,-4.9)
  Inner 1 w0.15: v2(-3.55,-2.775) -3.35,-2.775 -2.35,-1.775 -1.575,-1.775 5.8,5.6 5.8,6.525 6.175,6.9 6.175,7.725 6.9,8.45 v4(7.05,8.45) ; v1(-0.4,-4.9) v1(-0.4,-27) v1(-0.4,-30.8) v1(-0.4,-76.4) v1(-0.4,-80.2) v1(-0.4,-84) v1(-0.4,-87.8) v1(-0.4,-91.6) v1(-0.4,-95.4) v1(-0.4,-99.2) v1(-0.4,-102.3) v1@-0.4,-102.4
  Bottom Layer w0.15: -1.1,-102.9 v1@-0.571,-102.371
  other v1: -0.4,-72.6 -0.4,-68.8 -0.4,-65 -0.4,-61.2 -0.4,-57.4 -0.4,-53.6 -0.4,-49.8 -0.4,-46 -0.4,-42.2 -0.4,-38.4 -0.4,-34.6 -0.4,-23.2 -0.4,-19.4 -0.4,-15.6 -0.4,-11.8 -0.4,-8
X18: TCN.U.2.H12 | length 120.8
  Inner 3 w0.15: v2(-2.8,-2.775) -2.15,-3.425 -0.925,-3.425 -0.65,-3.7 2.2,-3.7 v1(3.4,-4.9)
  Inner 1 w0.15: v2(-2.8,-2.775) -2.6,-2.775 -1.85,-2.025 -1.45,-2.025 6.05,5.475 6.05,6.4 6.425,6.775 6.425,7.6 6.95,8.125 7.375,8.125 v4(7.7,8.45) ; v1@3.4,-102.4 v1(3.4,-102.3) v1(3.4,-99.2) v1(3.4,-95.4) v1(3.4,-91.6) v1(3.4,-87.8) v1(3.4,-84) v1(3.4,-80.2) v1(3.4,-76.4) v1(3.4,-30.8) v1(3.4,-27) v1(3.4,-4.9)
  other v1: 3.4,-72.6 3.4,-68.8 3.4,-65 3.4,-61.2 3.4,-57.4 3.4,-53.6 3.4,-49.8 3.4,-46 3.4,-42.2 3.4,-38.4 3.4,-34.6 3.4,-23.2 3.4,-19.4 3.4,-15.6 3.4,-11.8 3.4,-8
X19: TCN.U.2.J13 | length 113.2
  Inner 1 w0.15: v4(7.05,9.1) 7.375,8.775 7.825,8.775 8.675,7.925 8.675,5.725 8.475,5.525 8.25,5.525 8.05,5.325 8.05,4.2 7.2,3.35 v1(7.2,-4.9) v1(7.2,-27) v1(7.2,-30.8) v1(7.2,-76.4) v1(7.2,-80.2) v1(7.2,-84) v1(7.2,-87.8) v1(7.2,-91.6) v1(7.2,-95.4) v1(7.2,-99.2) v1(7.2,-102.3) v1@7.2,-102.4
  other v1: 7.2,-72.6 7.2,-68.8 7.2,-65 7.2,-61.2 7.2,-57.4 7.2,-53.6 7.2,-49.8 7.2,-46 7.2,-42.2 7.2,-38.4 7.2,-34.6 7.2,-23.2 7.2,-19.4 7.2,-15.6 7.2,-11.8 7.2,-8
X20: TCN.U.2.J12 | length 115.6
  Inner 1 w0.15: v4(7.7,9.1) 7.875,9.1 9.325,7.65 9.325,5.7 9.15,5.525 8.85,5.525 8.65,5.325 8.65,3.775 7.45,2.575 7.45,-2.95 8.25,-3.75 9.85,-3.75 v1(11,-4.9) v1(11,-27) v1(11,-30.8) v1(11,-76.4) v1(11,-80.2) v1(11,-84) v1(11,-87.8) v1(11,-91.6) v1(11,-95.4) v1(11,-99.2) v1(11,-102.3) v1@11,-102.4
  other v1: 11,-72.6 11,-68.8 11,-65 11,-61.2 11,-57.4 11,-53.6 11,-49.8 11,-46 11,-42.2 11,-38.4 11,-34.6 11,-23.2 11,-19.4 11,-15.6 11,-11.8 11,-8
X21: TCN.U.2.A1 | length 114.6
  Top Layer w0.15: v1(14.8,-4.9) 16.225,-3.475 19.825,-3.475 21.4,-1.9 21.4,-1.375 16.125,3.9 TCN.U.2.A1@14.85,3.9
  Inner 1 w0.15: v1@14.8,-102.4 v1(14.8,-102.3) v1(14.8,-99.2) v1(14.8,-95.4) v1(14.8,-91.6) v1(14.8,-87.8) v1(14.8,-84) v1(14.8,-80.2) v1(14.8,-76.4) v1(14.8,-72.6) v1(14.8,-68.8) v1(14.8,-65) v1(14.8,-61.2) v1(14.8,-57.4) v1(14.8,-53.6) v1(14.8,-49.8) v1(14.8,-46) v1(14.8,-42.2) v1(14.8,-38.4) v1(14.8,-34.6) v1(14.8,-30.8) v1(14.8,-27) v1(14.8,-23.2) v1(14.8,-19.4) v1(14.8,-15.6) v1(14.8,-11.8) v1(14.8,-8) v1(14.8,-4.9)
X22: TCN.U.2.A2 | length 112.3
  Top Layer w0.15: TCN.U.2.A2@14.2,3.9 14.525,4.225 16.15,4.225 21.65,-1.275 21.65,-2 18.75,-4.9 v1(18.6,-4.9)
  Inner 1 w0.15: v1@18.6,-102.4 v1(18.6,-102.3) v1(18.6,-99.2) v1(18.6,-95.4) v1(18.6,-91.6) v1(18.6,-87.8) v1(18.6,-84) v1(18.6,-80.2) v1(18.6,-76.4) v1(18.6,-72.6) v1(18.6,-68.8) v1(18.6,-65) v1(18.6,-61.2) v1(18.6,-57.4) v1(18.6,-53.6) v1(18.6,-49.8) v1(18.6,-46) v1(18.6,-42.2) v1(18.6,-38.4) v1(18.6,-34.6) v1(18.6,-30.8) v1(18.6,-27) v1(18.6,-23.2) v1(18.6,-19.4) v1(18.6,-15.6) v1(18.6,-11.8) v1(18.6,-8) v1(18.6,-4.9)
X23: TCN.U.2.B1 | length 111
  Top Layer w0.15: TCN.U.2.B1@14.85,4.55 14.869,4.531 16.194,4.531 22.4,-1.675 v1(22.4,-4.9)
  Inner 1 w0.15: v1@22.4,-102.4 v1(22.4,-102.3) v1(22.4,-99.2) v1(22.4,-95.4) v1(22.4,-91.6) v1(22.4,-87.8) v1(22.4,-84) v1(22.4,-80.2) v1(22.4,-76.4) v1(22.4,-72.6) v1(22.4,-68.8) v1(22.4,-65) v1(22.4,-61.2) v1(22.4,-57.4) v1(22.4,-53.6) v1(22.4,-49.8) v1(22.4,-46) v1(22.4,-42.2) v1(22.4,-38.4) v1(22.4,-34.6) v1(22.4,-30.8) v1(22.4,-27) v1(22.4,-23.2) v1(22.4,-19.4) v1(22.4,-15.6) v1(22.4,-11.8) v1(22.4,-8) v1(22.4,-4.9)
  Bottom Layer w0.15: v1(22.4,-4.9) ccw(c22.4,-4.659) v1@22.571,-4.829
X24: TCN.U.2.B2 | length 113.7
  Top Layer w0.15: TCN.U.2.B2@14.2,4.55 14.525,4.875 16.2,4.875 24.425,-3.35 24.65,-3.35 v1(26.2,-4.9)
  Inner 1 w0.15: v1@26.2,-102.4 v1(26.2,-102.3) v1(26.2,-99.2) v1(26.2,-95.4) v1(26.2,-91.6) v1(26.2,-87.8) v1(26.2,-84) v1(26.2,-80.2) v1(26.2,-76.4) v1(26.2,-72.6) v1(26.2,-68.8) v1(26.2,-65) v1(26.2,-61.2) v1(26.2,-57.4) v1(26.2,-53.6) v1(26.2,-49.8) v1(26.2,-46) v1(26.2,-42.2) v1(26.2,-38.4) v1(26.2,-34.6) v1(26.2,-30.8) v1(26.2,-27) v1(26.2,-23.2) v1(26.2,-19.4) v1(26.2,-15.6) v1(26.2,-11.8) v1(26.2,-8) v1(26.2,-4.9)
X25: TCN.U.2.C1 | length 116.8
  Inner 1 w0.15: v4(14.85,5.2) 14.975,5.2 23.85,-3.675 28.775,-3.675 v1(30,-4.9) v1(30,-8) v1(30,-11.8) v1(30,-15.6) v1(30,-19.4) v1(30,-23.2) v1(30,-27) v1(30,-30.8) v1(30,-34.6) v1(30,-38.4) v1(30,-42.2) v1(30,-46) v1(30,-49.8) v1(30,-53.6) v1(30,-57.4) v1(30,-61.2) v1(30,-65) v1(30,-68.8) v1(30,-72.6) v1(30,-76.4) v1(30,-80.2) v1(30,-84) v1(30,-87.8) v1(30,-91.6) v1(30,-95.4) v1(30,-99.2) v1(30,-102.3) v1@30,-102.4
X26: TCN.U.2.C2 | length 122.1
  Top Layer w0.15: TCN.U.2.C2@14.2,5.2 14.525,5.525 15.9,5.525 24.525,-3.1 32,-3.1 v1(33.8,-4.9)
  Inner 1 w0.15: v1@33.8,-102.4 v1(33.8,-102.3) v1(33.8,-99.2) v1(33.8,-95.4) v1(33.8,-91.6) v1(33.8,-87.8) v1(33.8,-84) v1(33.8,-80.2) v1(33.8,-76.4) v1(33.8,-72.6) v1(33.8,-68.8) v1(33.8,-65) v1(33.8,-61.2) v1(33.8,-57.4) v1(33.8,-53.6) v1(33.8,-49.8) v1(33.8,-46) v1(33.8,-42.2) v1(33.8,-38.4) v1(33.8,-34.6) v1(33.8,-30.8) v1(33.8,-27) v1(33.8,-23.2) v1(33.8,-19.4) v1(33.8,-15.6) v1(33.8,-11.8) v1(33.8,-8) v1(33.8,-4.9)
  Bottom Layer w0.15: v1(33.8,-4.9) ccw(c33.8,-4.176) 34.312,-4.688
X27: TCN.U.2.D1 | length 124.6
  Top Layer w0.15: TCN.U.2.D1@14.85,5.85 15.925,5.85 24.625,-2.85 32.1,-2.85 32.925,-3.675 36.375,-3.675 v1(37.6,-4.9)
  Inner 1 w0.15: v1(37.6,-102.3) v1(37.6,-99.2) v1(37.6,-95.4) v1(37.6,-91.6) v1(37.6,-87.8) v1(37.6,-84) v1(37.6,-80.2) v1(37.6,-76.4) v1(37.6,-72.6) v1(37.6,-68.8) v1(37.6,-65) v1(37.6,-61.2) v1(37.6,-57.4) v1(37.6,-53.6) v1(37.6,-49.8) v1(37.6,-46) v1(37.6,-42.2) v1(37.6,-38.4) v1(37.6,-34.6) v1(37.6,-30.8) v1(37.6,-27) v1(37.6,-23.2) v1(37.6,-19.4) v1(37.6,-15.6) v1(37.6,-11.8) v1(37.6,-8) v1(37.6,-4.9)
X28: TCN.U.2.D2 | length 129.2
  Inner 1 w0.15: v4(14.2,5.85) 14.7,5.85 23.975,-3.425 28.879,-3.425 29.129,-3.675 40.175,-3.675 v1(41.4,-4.9) v1(41.4,-15.6) v1(41.4,-27) v1(41.4,-30.8) v1(41.4,-46) v1(41.4,-57.4) v1(41.4,-76.4) v1(41.4,-80.2) v1(41.4,-84) v1(41.4,-87.8) v1(41.4,-91.6) v1(41.4,-95.4) v1(41.4,-99.2) v1(41.4,-102.3) v1@41.4,-102.4
  other v1: 41.4,-72.6 41.4,-68.8 41.4,-65 41.4,-61.2 41.4,-53.6 41.4,-49.8 41.4,-42.2 41.4,-38.4 41.4,-34.6 41.4,-23.2 41.4,-19.4 41.4,-11.8 41.4,-8
X29: TCN.U.2.D3 | length 134.5
  Inner 1 w0.15: v4(13.55,5.85) 13.875,6.175 14.75,6.175 24.1,-3.175 28.982,-3.175 29.232,-3.425 40.279,-3.425 40.529,-3.675 43.975,-3.675 v1(45.2,-4.9) v1(45.2,-27) v1(45.2,-30.8) v1(45.2,-76.4) v1(45.2,-80.2) v1(45.2,-84) v1(45.2,-87.8) v1(45.2,-91.6) v1(45.2,-95.4) v1(45.2,-99.2) v1(45.2,-102.3) v1@45.2,-102.4
  Bottom Layer w0.15: v1(45.2,-4.9) 45.656,-4.444
  other v1: 45.2,-72.6 45.2,-68.8 45.2,-65 45.2,-61.2 45.2,-57.4 45.2,-53.6 45.2,-49.8 45.2,-46 45.2,-42.2 45.2,-38.4 45.2,-34.6 45.2,-23.2 45.2,-19.4 45.2,-15.6 45.2,-11.8 45.2,-8
X30: TCN.U.2.E1 | length 136.3
  Inner 1 w0.15: v4(14.85,6.5) 24.275,-2.925 29.086,-2.925 29.336,-3.175 40.382,-3.175 40.632,-3.425 44.079,-3.425 44.329,-3.675 47.775,-3.675 v1(49,-4.9) ; v1@49,-102.4 v1(49,-102.3) v1(49,-99.2) v1(49,-95.4) v1(49,-91.6) v1(49,-87.8) v1(49,-84) v1(49,-80.2) v1(49,-76.4) v1(49,-72.6) v1(49,-68.8) v1(49,-65) v1(49,-61.2) v1(49,-57.4) v1(49,-53.6) v1(49,-49.8) v1(49,-46) v1(49,-42.2) v1(49,-38.4) v1(49,-34.6) v1(49,-30.8) v1(49,-27) v1(49,-23.2) v1(49,-19.4) v1(49,-15.6) v1(49,-11.8) v1(49,-8) v1@49,-5
X31: TCN.U.2.E2 | length 141.3
  Inner 1 w0.15: v4(14.2,6.5) 14.525,6.825 14.95,6.825 24.45,-2.675 29.189,-2.675 29.439,-2.925 40.486,-2.925 40.736,-3.175 44.182,-3.175 44.432,-3.425 47.879,-3.425 48.129,-3.675 51.575,-3.675 v1(52.8,-4.9) ; v1@52.8,-102.4 v1(52.8,-99.2) v1(52.8,-95.4) v1(52.8,-91.6) v1(52.8,-87.8) v1(52.8,-84) v1(52.8,-80.2) v1(52.8,-76.4) v1(52.8,-72.6) v1(52.8,-68.8) v1(52.8,-65) v1(52.8,-61.2) v1(52.8,-57.4) v1(52.8,-53.6) v1(52.8,-49.8) v1(52.8,-46) v1(52.8,-42.2) v1(52.8,-38.4) v1(52.8,-34.6) v1(52.8,-30.8) v1(52.8,-27) v1(52.8,-23.2) v1(52.8,-19.4) v1(52.8,-15.6) v1(52.8,-11.8) v1(52.8,-8) v1(52.8,-4.9) ; v1@52.871,-4.729 ccw(c53.041,-4.9) v1(52.8,-4.9)
  other v1: 52.8,-102.3
X32: TCN.U.2.E3 | length 145.7
  Inner 1 w0.15: v4(13.55,6.5) 14.125,7.075 15.075,7.075 24.575,-2.425 29.293,-2.425 29.543,-2.675 40.589,-2.675 40.839,-2.925 44.286,-2.925 44.536,-3.175 47.982,-3.175 48.232,-3.425 51.679,-3.425 51.929,-3.675 55.375,-3.675 v1(56.6,-4.9) ; v1@56.544,-4.844 v1(56.6,-4.9) ; v1(56.6,-102.3) v1(56.6,-80.2) v1(56.6,-76.4) v1(56.6,-30.8) v1(56.6,-27) v1(56.6,-23.2) v1(56.6,-19.4) v1(56.6,-15.6) v1(56.6,-11.8) v1(56.6,-8) v1(56.6,-4.9)
  other v1: 56.6,-99.2 56.6,-95.4 56.6,-91.6 56.6,-87.8 56.6,-84 56.6,-72.6 56.6,-68.8 56.6,-65 56.6,-61.2 56.6,-57.4 56.6,-53.6 56.6,-49.8 56.6,-46 56.6,-42.2 56.6,-38.4 56.6,-34.6
X33: TCN.U.2.F1 | length 148
  Top Layer w0.15: TCN.U.2.F1@14.85,7.15 14.975,7.15 24.725,-2.6 32.2,-2.6 33.035,-3.435 36.474,-3.435 36.714,-3.675 59.175,-3.675 v1(60.4,-4.9)
  Inner 1 w0.15: v1@60.4,-102.4 v1(60.4,-102.3) v1(60.4,-99.2) v1(60.4,-95.4) v1(60.4,-91.6) v1(60.4,-87.8) v1(60.4,-84) v1(60.4,-80.2) v1(60.4,-76.4) v1(60.4,-72.6) v1(60.4,-68.8) v1(60.4,-65) v1(60.4,-61.2) v1(60.4,-57.4) v1(60.4,-53.6) v1(60.4,-49.8) v1(60.4,-46) v1(60.4,-42.2) v1(60.4,-38.4) v1(60.4,-34.6) v1(60.4,-30.8) v1(60.4,-27) v1(60.4,-23.2) v1(60.4,-19.4) v1(60.4,-15.6) v1(60.4,-11.8) v1(60.4,-8) v1(60.4,-4.9)
X34: TCN.U.2.F2 | length 153
  Top Layer w0.15: TCN.U.2.F2@14.2,7.15 14.525,7.475 15,7.475 15.7,6.775 24.835,-2.36 32.299,-2.36 33.134,-3.195 36.574,-3.195 36.814,-3.435 59.274,-3.435 59.514,-3.675 62.975,-3.675 v1(64.2,-4.9)
  Inner 1 w0.15: v1@64.2,-102.4 v1(64.2,-102.3) v1(64.2,-99.2) v1(64.2,-95.4) v1(64.2,-91.6) 64.2,-91.571 v1(64.2,-87.8) 64.2,-87.771 v1(64.2,-76.4) v1(64.2,-65) v1(64.2,-53.6) 64.2,-49.771 v1(64.2,-46) 64.2,-45.971 v1(64.2,-34.6) v1(64.2,-23.2) v1(64.2,-11.8) v1(64.2,-4.9) v1@64.2,-4.7
  other v1: 64.2,-84 64.2,-80.2 64.2,-72.6 64.2,-68.8 64.2,-61.2 64.2,-57.4 64.2,-49.8 64.2,-42.2 64.2,-38.4 64.2,-30.8 64.2,-27 64.2,-19.4 64.2,-15.6 64.2,-8
X35: TCN.U.2.F3 | length 157.5
  Inner 1 w0.15: v4(13.55,7.15) 13.725,7.325 15.2,7.325 24.7,-2.175 29.396,-2.175 29.646,-2.425 40.693,-2.425 40.943,-2.675 44.389,-2.675 44.639,-2.925 48.086,-2.925 48.336,-3.175 51.782,-3.175 52.032,-3.425 55.479,-3.425 55.729,-3.675 66.775,-3.675 v1(68,-4.9) v1(68,-8) v1(68,-11.8) v1(68,-15.6) v1(68,-19.4) v1(68,-23.2) v1(68,-27) v1(68,-30.8) v1(68,-34.6) v1(68,-38.4) v1(68,-42.2) v1(68,-46) v1(68,-49.8) v1(68,-53.6) v1(68,-57.4) v1(68,-61.2) v1(68,-65) v1(68,-68.8) v1(68,-72.6) v1(68,-76.4) v1(68,-80.2) v1(68,-84) v1(68,-87.8) v1(68,-91.6) v1(68,-95.4) v1(68,-99.2) v1(68,-102.3) v1@68,-102.4
  Bottom Layer w0.15: v1@67.6,-4.9 v1(68,-4.9)
X36: TCN.U.2.G1 | length 159.8
  Top Layer w0.15: TCN.U.2.G1@14.85,7.8 15.025,7.8 15.95,6.875 24.945,-2.12 32.399,-2.12 33.234,-2.955 36.673,-2.955 36.913,-3.195 59.374,-3.195 59.614,-3.435 62.434,-3.435 63.074,-3.435 63.314,-3.675 70.575,-3.675 v1(71.8,-4.9)
  Inner 1 w0.15: v1@71.702,-4.802 v1(71.8,-4.9) v1(71.8,-8) v1(71.8,-11.8) v1(71.8,-15.6) v1(71.8,-19.4) v1(71.8,-23.2) v1(71.8,-27) v1(71.8,-30.8) v1(71.8,-34.6) v1(71.8,-38.4) v1(71.8,-42.2) v1(71.8,-46) v1(71.8,-49.8) v1(71.8,-53.6) v1(71.8,-57.4) v1(71.8,-61.2) v1(71.8,-65) v1(71.8,-68.8) v1(71.8,-72.6) v1(71.8,-76.4) v1(71.8,-80.2) v1(71.8,-84) v1(71.8,-87.8) v1(71.8,-91.6) v1(71.8,-95.4) v1(71.8,-99.2) v1(71.8,-102.3) v1@71.8,-102.4
X37: TCN.U.2.G2 | length 164.6
  Top Layer w0.15: TCN.U.2.G2@14.2,7.8 14.525,8.125 15.05,8.125 16.2,6.975 25.055,-1.88 32.498,-1.88 33.333,-2.715 36.773,-2.715 37.013,-2.955 59.473,-2.955 59.713,-3.195 62.155,-3.195 63.174,-3.195 63.414,-3.435 69.904,-3.435 70.674,-3.435 70.914,-3.675 74.375,-3.675 v1(75.6,-4.9)
  Inner 1 w0.15: v1@75.514,-4.814 v1(75.6,-4.9) v1(75.6,-8) v1(75.6,-11.8) v1(75.6,-15.6) v1(75.6,-19.4) v1(75.6,-23.2) v1(75.6,-27) v1(75.6,-30.8) v1(75.6,-34.6) v1(75.6,-38.4) v1(75.6,-42.2) v1(75.6,-46) v1(75.6,-49.8) v1(75.6,-53.6) v1(75.6,-57.4) v1(75.6,-61.2) v1(75.6,-65) v1(75.6,-68.8) v1(75.6,-72.6) v1(75.6,-76.4) v1(75.6,-80.2) v1(75.6,-84) v1(75.6,-87.8) v1(75.6,-91.6) v1(75.6,-95.4) v1(75.6,-99.2) v1(75.6,-102.3) v1@75.6,-102.4
X38: TCN.U.2.H1 | length 167.6
  Top Layer w0.15: TCN.U.2.H1@14.85,8.45 15.075,8.45 15.125,8.4 16.45,7.075 25.165,-1.64 32.598,-1.64 33.433,-2.475 36.872,-2.475 37.112,-2.715 59.573,-2.715 59.813,-2.955 62.056,-2.955 63.273,-2.955 63.513,-3.195 69.805,-3.195 70.774,-3.195 71.014,-3.435 73.354,-3.435 74.474,-3.435 74.714,-3.675 78.175,-3.675 v1(79.4,-4.9)
  Inner 1 w0.15: v1@79.4,-102.4 v1(79.4,-102.3) v1(79.4,-99.2) v1(79.4,-95.4) v1(79.4,-91.6) v1(79.4,-87.8) v1(79.4,-84) v1(79.4,-80.2) v1(79.4,-76.4) v1(79.4,-72.6) v1(79.4,-68.8) v1(79.4,-65) v1(79.4,-61.2) v1(79.4,-57.4) v1(79.4,-53.6) v1(79.4,-49.8) v1(79.4,-46) v1(79.4,-42.2) v1(79.4,-38.4) v1(79.4,-34.6) v1(79.4,-30.8) v1(79.4,-27) v1(79.4,-23.2) v1(79.4,-19.4) v1(79.4,-15.6) v1(79.4,-11.8) v1(79.4,-8) v1(79.4,-4.9)
X39: TCN.U.2.H2 | length 172.3
  Inner 1 w0.15: v4(14.2,8.45) 14.45,8.45 24.825,-1.925 29.5,-1.925 29.75,-2.175 40.796,-2.175 41.046,-2.425 44.493,-2.425 44.743,-2.675 48.189,-2.675 48.439,-2.925 51.886,-2.925 52.136,-3.175 55.582,-3.175 55.832,-3.425 66.879,-3.425 67.129,-3.675 81.975,-3.675 v1(83.2,-4.9) ; v1@82.977,-4.677 v1(83.2,-4.9) ; v1@83.2,-102.4 v1(83.2,-102.3) v1(83.2,-99.2) v1(83.2,-95.4) v1(83.2,-91.6) v1(83.2,-87.8) v1(83.2,-84) v1(83.2,-80.2) v1(83.2,-76.4) v1(83.2,-72.6) v1(83.2,-68.8) v1(83.2,-65) v1(83.2,-61.2) v1(83.2,-57.4) v1(83.2,-53.6) v1(83.2,-49.8) v1(83.2,-46) v1(83.2,-42.2) v1(83.2,-38.4) v1(83.2,-34.6) v1(83.2,-30.8) v1(83.2,-27) v1(83.2,-23.2) v1(83.2,-19.4) v1(83.2,-15.6) v1(83.2,-11.8) v1(83.2,-8) v1(83.2,-4.9)
X40: TCN.U.2.J1 | length 176
  Inner 1 w0.15: v4(14.85,9.1) 14.85,8.425 24.95,-1.675 29.603,-1.675 29.853,-1.925 40.9,-1.925 41.15,-2.175 44.596,-2.175 44.846,-2.425 48.293,-2.425 48.543,-2.675 51.989,-2.675 52.239,-2.925 55.686,-2.925 55.936,-3.175 66.982,-3.175 67.232,-3.425 82.079,-3.425 82.329,-3.675 85.775,-3.675 v1(87,-4.9) ; v1@86.924,-4.824 v1(87,-4.9) ; v1@87,-102.4 v1(87,-102.3) v1(87,-99.2) v1(87,-95.4) v1(87,-91.6) v1(87,-87.8) v1(87,-84) v1(87,-80.2) 87,-76.3 87,-30.7 v1(87,-27) v1(87,-4.9)
  other v1: 87,-76.4 87,-72.6 87,-68.8 87,-65 87,-61.2 87,-57.4 87,-53.6 87,-49.8 87,-46 87,-42.2 87,-38.4 87,-34.6 87,-30.8 87,-23.2 87,-19.4 87,-15.6 87,-11.8 87,-8
Y0: TCN.U.2.A10 | length 371.1
  Inner 1 w0.15: v3(-66.4,-101.1) -67.55,-99.95 -67.55,-96.504 -67.825,-96.229 -67.825,-92.782 -68.075,-92.532 -68.075,-89.086 -68.325,-88.836 -68.325,-85.289 -68.575,-85.039 -68.575,-81.693 -68.8,-81.468 -68.8,-2.83 -64.92,1.05 -63.82,2.15 -59.85,2.15 v2(-59.55,1.85)
  Bottom Layer w0.15: v2(-59.55,1.85) -57.788,0.088 -49.687,0.088 -48.75,1.025 -9.375,1.025 -8.201,2.199 -1.376,2.199 -0.425,3.15 1.8,3.15 5.875,-0.925 8.275,-0.925 9,-0.2 v4(9,3.9)
  Bottom Layer w0.2: v3@-66.625,-101.1 88.425,-101.1 ; -65.4,-101.1 -64.7,-101.1 ; -61.6,-101.1 -60.9,-101.1 ; -57.8,-101.1 -57.1,-101.1 ; -54,-101.1 -53.3,-101.1 ; -50.2,-101.1 -49.5,-101.1 ; -46.4,-101.1 -45.7,-101.1 ; -42.6,-101.1 -41.9,-101.1 ; -38.8,-101.1 -38.1,-101.1 ; -35,-101.1 -34.3,-101.1 ; -31.2,-101.1 -30.5,-101.1 ; -27.4,-101.1 -26.7,-101.1 ; -23.6,-101.1 -22.9,-101.1 ; -19.8,-101.1 -19.1,-101.1 ; -16,-101.1 -15.3,-101.1 ; -12.2,-101.1 -11.5,-101.1 ; -8.4,-101.1 -7.7,-101.1 ; -4.6,-101.1 -3.9,-101.1 ; -0.8,-101.1 -0.1,-101.1 ; 3,-101.1 3.7,-101.1 ; 6.8,-101.1 7.5,-101.1 ; 10.6,-101.1 11.3,-101.1 ; 14.4,-101.1 15.1,-101.1 ; 18.2,-101.1 18.9,-101.1 ; 22,-101.1 22.7,-101.1 ; 25.8,-101.1 26.5,-101.1 ; 29.6,-101.1 30.3,-101.1 ; 33.4,-101.1 34.1,-101.1 ; 37.2,-101.1 37.9,-101.1 ; 41,-101.1 41.7,-101.1 ; 44.8,-101.1 45.5,-101.1 ; 48.6,-101.1 49.3,-101.1 ; 52.4,-101.1 53.1,-101.1 ; 56.2,-101.1 56.9,-101.1 ; 60,-101.1 60.7,-101.1 ; 63.8,-101.1 64.5,-101.1 ; 67.6,-101.1 68.3,-101.1 ; 71.4,-101.1 72.1,-101.1 ; 75.2,-101.1 75.9,-101.1 ; 79,-101.1 79.7,-101.1 ; 82.8,-101.1 83.5,-101.1 ; 86.6,-101.1 87.3,-101.1
Y1: TCN.U.2.B10 | length 368.1
  Inner 1 w0.15: v3(-66.4,-97.3) -67.575,-96.125 -67.575,-92.679 -67.825,-92.429 -67.825,-88.982 -68.075,-88.732 -68.075,-85.186 -68.325,-84.936 -68.325,-81.589 -68.55,-81.364 -68.55,-2.934 -64.816,0.8 -63.716,1.9 -60.6,1.9 v2(-60.425,1.725)
  Bottom Layer w0.15: v2(-60.425,1.725) -60.325,1.825 -60.1,1.825 -58.097,-0.178 -49.578,-0.178 -48.64,0.76 -9.265,0.76 -8.091,1.934 -1.266,1.934 -0.315,2.885 1.69,2.885 5.75,-1.175 8.392,-1.175 9.29,-0.277 9.29,4.26 v4(9,4.55)
  Bottom Layer w0.2: v3@-66.625,-97.3 88.425,-97.3 ; -65.4,-97.3 -64.7,-97.3 ; -61.6,-97.3 -60.9,-97.3 ; -57.8,-97.3 -57.1,-97.3 ; -54,-97.3 -53.3,-97.3 ; -50.2,-97.3 -49.5,-97.3 ; -46.4,-97.3 -45.7,-97.3 ; -42.6,-97.3 -41.9,-97.3 ; -38.8,-97.3 -38.1,-97.3 ; -35,-97.3 -34.3,-97.3 ; -31.2,-97.3 -30.5,-97.3 ; -27.4,-97.3 -26.7,-97.3 ; -23.6,-97.3 -22.9,-97.3 ; -19.8,-97.3 -19.1,-97.3 ; -16,-97.3 -15.3,-97.3 ; -12.2,-97.3 -11.5,-97.3 ; -8.4,-97.3 -7.7,-97.3 ; -4.6,-97.3 -3.9,-97.3 ; -0.8,-97.3 -0.1,-97.3 ; 3,-97.3 3.7,-97.3 ; 6.8,-97.3 7.5,-97.3 ; 10.6,-97.3 11.3,-97.3 ; 14.4,-97.3 15.1,-97.3 ; 18.2,-97.3 18.9,-97.3 ; 22,-97.3 22.7,-97.3 ; 25.8,-97.3 26.5,-97.3 ; 29.6,-97.3 30.3,-97.3 ; 33.4,-97.3 34.1,-97.3 ; 37.2,-97.3 37.9,-97.3 ; 41,-97.3 41.7,-97.3 ; 44.8,-97.3 45.5,-97.3 ; 48.6,-97.3 49.3,-97.3 ; 52.4,-97.3 53.1,-97.3 ; 56.2,-97.3 56.9,-97.3 ; 60,-97.3 60.7,-97.3 ; 63.8,-97.3 64.5,-97.3 ; 67.6,-97.3 68.3,-97.3 ; 71.4,-97.3 72.1,-97.3 ; 75.2,-97.3 75.9,-97.3 ; 79,-97.3 79.7,-97.3 ; 82.8,-97.3 83.5,-97.3 ; 86.6,-97.3 87.3,-97.3
Y2: TCN.U.2.C10 | length 364.1
  Inner 4 w0.15: v2(-61.3,1.475) -61.325,1.45 -61.325,1.35 -59.425,1.35 -58.127,0.052 -49.673,0.052 -48.735,0.99 -9.36,0.99 -8.186,2.164 -1.361,2.164 -0.41,3.115 1.785,3.115 5.875,-0.975 8.575,-0.975 9.325,-0.225 9.325,4.875 v4(9,5.2)
  Inner 1 w0.15: v3(-66.4,-93.5) -67.575,-92.325 -67.575,-88.879 -67.825,-88.629 -67.825,-85.082 -68.075,-84.832 -68.075,-81.486 -68.3,-81.261 -68.3,-3.038 -64.712,0.55 -63.687,1.575 -61.4,1.575 v2(-61.3,1.475)
  Bottom Layer w0.2: v3@-66.5,-93.5 88.55,-93.5 ; -65.4,-93.5 -64.7,-93.5 ; -61.6,-93.5 -60.9,-93.5 ; -57.8,-93.5 -57.1,-93.5 ; -54,-93.5 -53.3,-93.5 ; -50.2,-93.5 -49.5,-93.5 ; -46.4,-93.5 -45.7,-93.5 ; -42.6,-93.5 -41.9,-93.5 ; -38.8,-93.5 -38.1,-93.5 ; -35,-93.5 -34.3,-93.5 ; -31.2,-93.5 -30.5,-93.5 ; -27.4,-93.5 -26.7,-93.5 ; -23.6,-93.5 -22.9,-93.5 ; -19.8,-93.5 -19.1,-93.5 ; -16,-93.5 -15.3,-93.5 ; -12.2,-93.5 -11.5,-93.5 ; -8.4,-93.5 -7.7,-93.5 ; -4.6,-93.5 -3.9,-93.5 ; -0.8,-93.5 -0.1,-93.5 ; 3,-93.5 3.7,-93.5 ; 6.8,-93.5 7.5,-93.5 ; 10.6,-93.5 11.3,-93.5 ; 14.4,-93.5 15.1,-93.5 ; 18.2,-93.5 18.9,-93.5 ; 22,-93.5 22.7,-93.5 ; 25.8,-93.5 26.5,-93.5 ; 29.6,-93.5 30.3,-93.5 ; 33.4,-93.5 34.1,-93.5 ; 37.2,-93.5 37.9,-93.5 ; 41,-93.5 41.7,-93.5 ; 44.8,-93.5 45.5,-93.5 ; 48.6,-93.5 49.3,-93.5 ; 52.4,-93.5 53.1,-93.5 ; 56.2,-93.5 56.9,-93.5 ; 60,-93.5 60.7,-93.5 ; 63.8,-93.5 64.5,-93.5 ; 67.6,-93.5 68.3,-93.5 ; 71.4,-93.5 72.1,-93.5 ; 75.2,-93.5 75.9,-93.5 ; 79,-93.5 79.7,-93.5 ; 82.8,-93.5 83.5,-93.5 ; 86.6,-93.5 87.3,-93.5